# EAGLE board OF1 v1 (EAGLE 9.6.0)
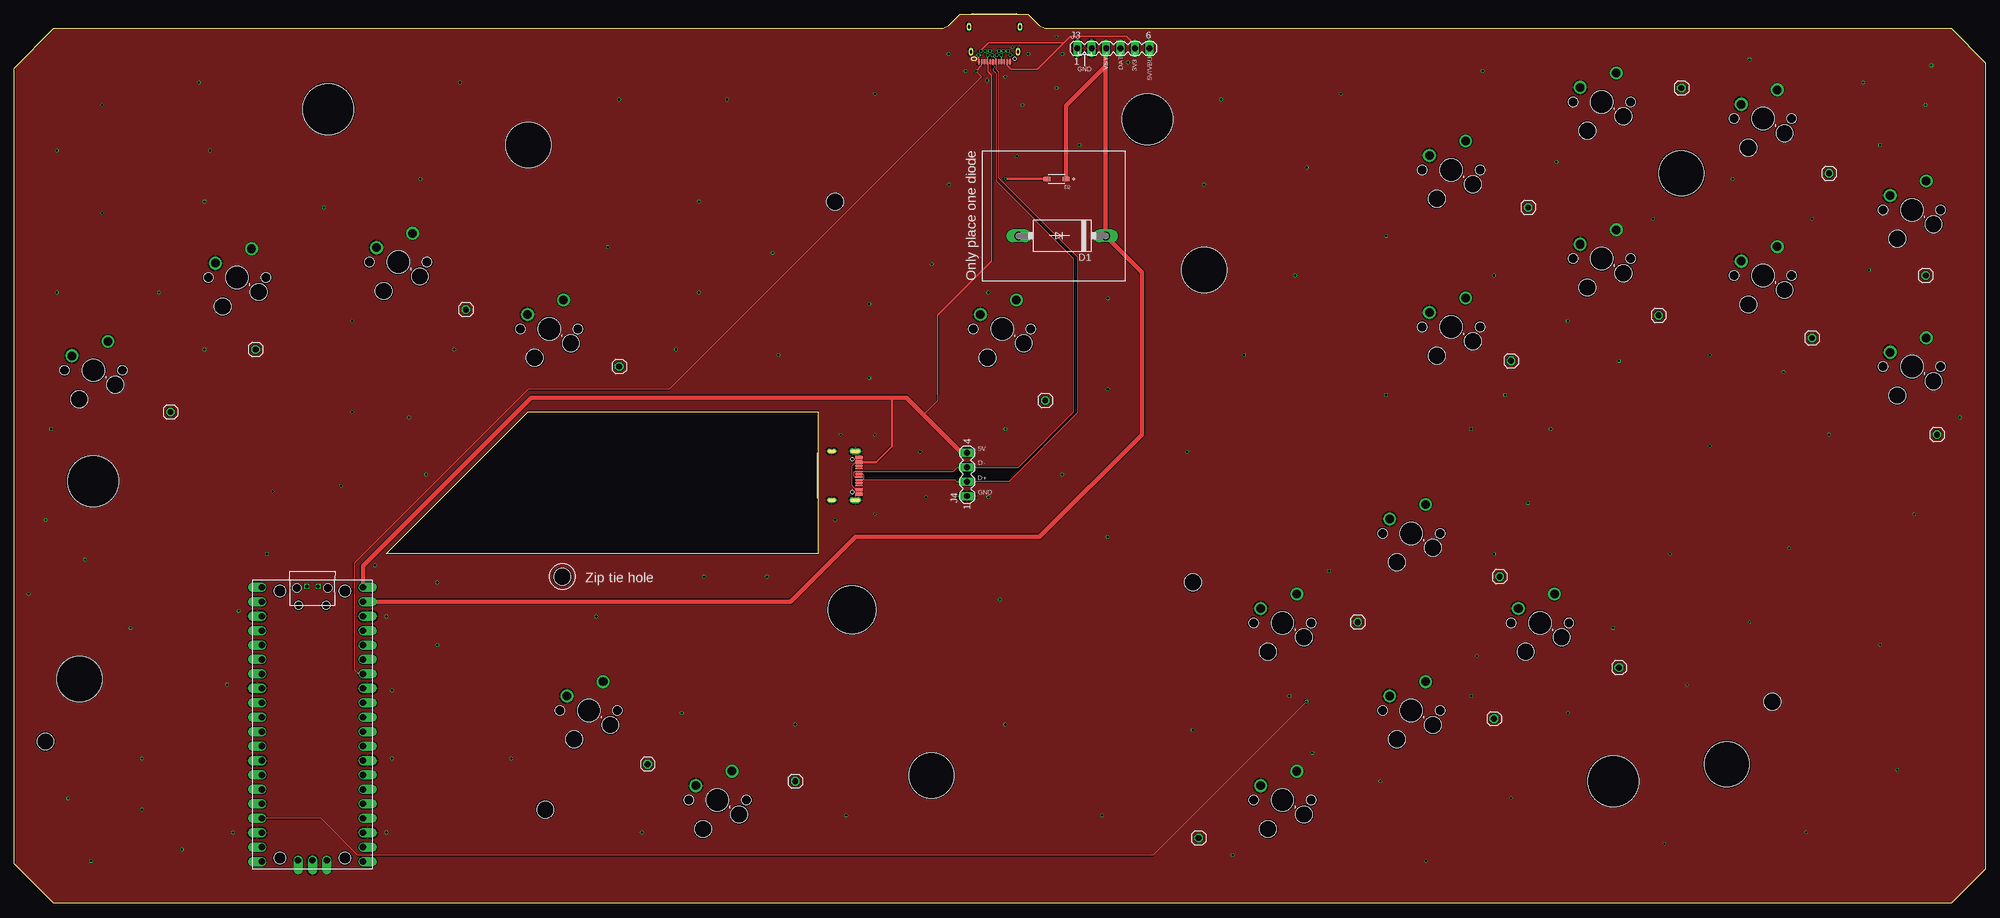
[diagram p0: board, top side]
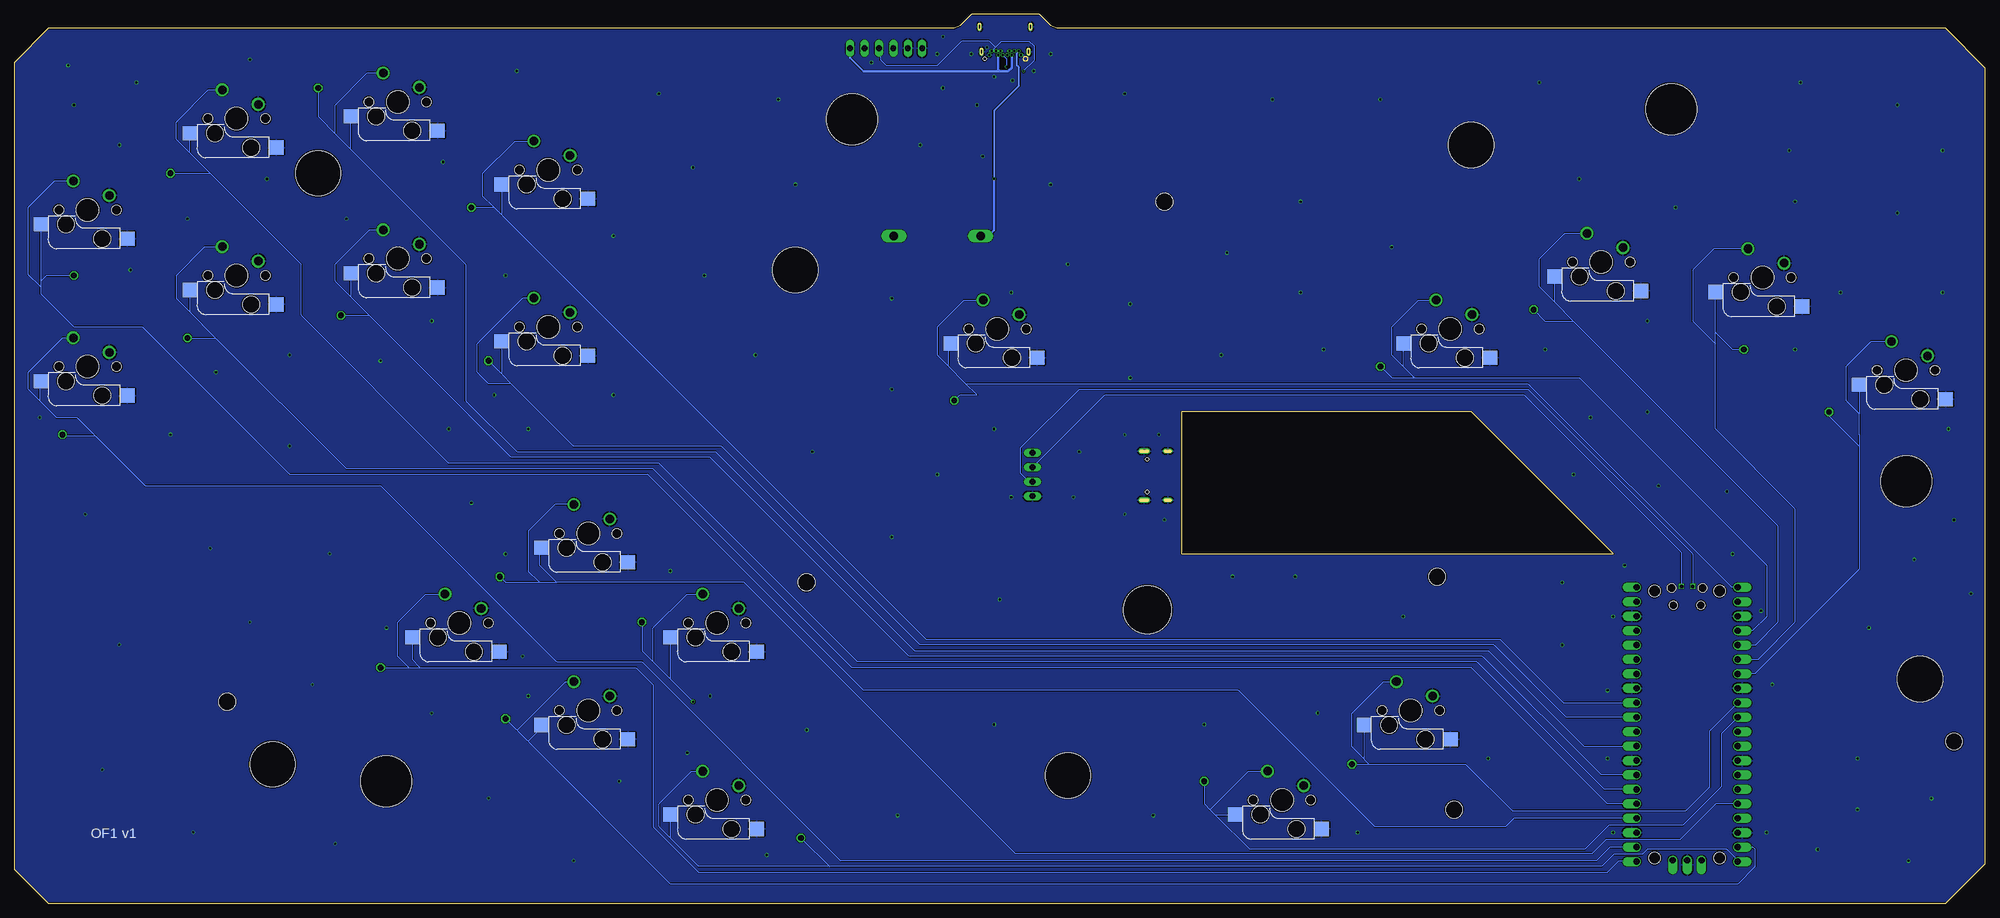
[diagram p1: board, bottom side, seen from below]

Size 347 x 156.5 mm. Coordinates in mm from the lower left corner, seen from the top.
Outline: 0,7 0,147 7,154 163.5,154 164.5,154.5 166.5,156.5 178.5,156.5 180.5,154.5 181.5,154 341,154 347,148 347,6 341,0 7,0 0,7
Outline: 141.5,86.5 141.5,61.5 65.5,61.5 90.5,86.5 141.5,86.5
Copper layers (1*16): Top 0.035559375mm / dielectric 1.6mm / Bottom 0.035559375mm
Design rules "jlcpcb2layer": minimum track width 5mil, minimum drill 12mil, track to track 5mil, track to pad 5mil, pad to pad 5mil, via to via 5mil, smd to smd 5mil, copper to edge 8mil, drill to drill 6mil, minimum pad ring 5mil, minimum via ring 3mil, stop-mask expansion 2.5mil, vias tented up to drill 0mil, thermal gap 10mil
Holes 3 mm at 93.5,16.5 309.5,35.5 5.5,28.5 207.5,56.5 144.5,123.5 96.5,57.5
Holes 8 mm at 293.5,128.5 301.5,24.5 11.5,39.5 90.5,133.5 209.5,111.5 161.5,22.5
Holes 9 mm at 199.5,138 13.9,74.3 55.3,139.8 281.5,21.5
Holes 8.5 mm at 147.5,51.7

## Footprints (pad centres in the part's own frame; a part is rotated, then mirrored left to right if it is on the bottom)
DO201-15 = drill 1.499 long: A 7.62,0; C -7.62,0
SOD3715X145N = smd 1.21 x 0.73: A 1.68,0; C -1.68,0
RPI_PICO_TH = drill 1.1 pad 1.6 offset: 3V3 8.89,13.97; 3V3_EN 8.89,16.51; ADC_VREF 8.89,11.43; AGND 8.89,6.35; GND@1 -8.89,19.05; GND@2 -8.89,6.35; GND@3 -8.89,-6.35; GND@4 -8.89,-19.05; GND@5 0,-23.9; GND@6 8.89,-19.05; GND@7 8.89,-6.35; GND@8 8.89,19.05; GP0 -8.89,24.13; GP1 -8.89,21.59; GP2 -8.89,16.51; GP3 -8.89,13.97; GP4 -8.89,11.43; GP5 -8.89,8.89; GP6 -8.89,3.81; GP7 -8.89,1.27; GP8 -8.89,-1.27; GP9 -8.89,-3.81; GP10 -8.89,-8.89; GP11 -8.89,-11.43; GP12 -8.89,-13.97; GP13 -8.89,-16.51; GP14 -8.89,-21.59; GP15 -8.89,-24.13; GP16 8.89,-24.13; GP17 8.89,-21.59; GP18 8.89,-16.51; GP19 8.89,-13.97; GP20 8.89,-11.43; GP21 8.89,-8.89; GP22 8.89,-3.81; GP26_A0 8.89,1.27; GP27_A1 8.89,3.81; GP28_A2 8.89,8.89; RUN 8.89,-1.27; SWCLK -2.54,-23.9; SWDIO 2.54,-23.9; VBUS 8.89,24.13; VSYS 8.89,21.59 | drill 0.6 pad 0.8 square: TP2 1,24.3; TP3 -1,24.3 | hole 1.5: -2.725,24; 2.725,24; -2.425,20.97; 2.425,20.97 | hole 2.1: -5.7,23.5; 5.7,23.5; -5.7,-23.5; 5.7,-23.5
24P = smd 0.3 x 0.9: A1 -2.75,0; A2 -2.25,0; A3 -1.75,0; A4 -1.25,0; A5 -0.75,0; A6 -0.25,0; A7 0.25,0; A8 0.75,0; A9 1.25,0; A10 1.75,0; A11 2.25,0; A12 2.75,0 | drill 0.4 pad 0.65: B1 2.8,-1.21; B2 2.4,-1.91; B3 1.6,-1.91; B4 1.2,-1.21; B5 0.8,-1.91; B6 0.4,-1.21; B7 -0.4,-1.21; B8 -0.8,-1.91; B9 -1.2,-1.21; B10 -1.6,-1.91; B11 -2.4,-1.91; B12 -2.8,-1.21 | drill 0.5 pad 0.75 long: SHIELD1 -4.13,-1.81; SHIELD2 4.13,-1.81; SHIELD3 -4.49,-6.2; SHIELD4 4.49,-6.2 | hole 0.65: -3.6,-0.56
MA06-1 = drill 1.016 long: 1 -6.35,0; 2 -3.81,0; 3 -1.27,0; 4 1.27,0; 5 3.81,0; 6 6.35,0
MA04-1 = drill 1.016 long: 1 -3.81,0; 2 -1.27,0; 3 1.27,0; 4 3.81,0
16P = smd 0.6 x 1.24: A1/B12 -3.2,4.8; A4/B9 -2.4,4.8; B1/A12 3.2,4.8; B4/A9 2.4,4.8 | smd 0.3 x 1.24: A5 -1.25,4.8; A6 -0.25,4.8; A7 0.25,4.8; A8 1.25,4.8; B5 1.75,4.8; B6 0.75,4.8; B7 -0.75,4.8; B8 -1.75,4.8 | drill 0.6 pad 1.05 long: SHIELD1 -4.32,4.18; SHIELD3 4.32,4.18 | drill 0.6 pad 0.9 long: SHIELD2 -4.32,0; SHIELD4 4.32,0 | hole 0.65: -2.89,3.68; 2.89,3.68
1X01 = drill 1.016 octagon: 1 0,0
MX-BOTH = drill 1.499: P$1 3.81,-2.54; P$2 -2.54,-5.08 | smd 2.55 x 2.5 bottom: P$3 -8.255,2.54; P$4 6.985,5.08 | hole 3.988: 0,0 | hole 3: -3.81,2.54; 2.54,5.08 | hole 1.702: 5.08,0; -5.08,0

## Placement (x,y rotation side)
D1  1N5400  [DO201-15]  184.5,117.5 180 top
D2  1N5819HW-7-F  [SOD3715X145N]  183.5,127.5 180 top
J1  [RPI_PICO_TH]  52.5,31.5 0 top
J2  MOLEX2171830001  [24P]  172.57,148.1 180 top
J3  [MA06-1]  193.5,150.5 0 top
J4  [MA04-1]  167.74,75.5 90 top
J5  GT-USB-7010ASV  [16P]  143.9,75.28 270 top
JP2  [1X01]  27.5,86.5 0 top
JP3  [1X01]  42.5,97.5 0 top
JP4  [1X01]  79.5,104.5 0 top
JP5  [1X01]  106.5,94.5 0 top
JP6  [1X01]  111.5,24.5 0 top
JP7  [1X01]  137.5,21.5 0 top
JP8  [1X01]  181.5,88.5 0 top
JP9  [1X01]  266.5,122.5 0 top
JP10  [1X01]  263.5,95.5 0 top
JP11  [1X01]  289.5,103.5 0 top
JP12  [1X01]  293.5,143.5 0 top
JP13  [1X01]  319.5,128.5 0 top
JP14  [1X01]  336.5,110.5 0 top
JP15  [1X01]  338.5,82.5 0 top
JP16  [1X01]  316.5,99.5 0 top
JP17  [1X01]  261.5,57.5 0 top
JP18  [1X01]  236.5,49.5 0 top
JP19  [1X01]  282.5,41.5 0 top
JP20  [1X01]  260.5,32.5 0 top
JP21  [1X01]  208.5,11.5 0 top
U$1  MX-B  [MX-BOTH]  13.97,93.84 180 top
U$2  MX-B  [MX-BOTH]  39.25,110.14 180 top
U$4  MX-B  [MX-BOTH]  67.6,112.86 180 top
U$5  MX-B  [MX-BOTH]  94.17,101.1 180 top
U$6  MX-B  [MX-BOTH]  101.13,33.95 180 top
U$7  MX-B  [MX-BOTH]  123.82,18.18 180 top
U$8  MX-B  [MX-BOTH]  173.91,101.1 180 top
U$9  MX-B  [MX-BOTH]  252.97,129.08 180 top
U$10  MX-B  [MX-BOTH]  279.49,141.08 180 top
U$11  MX-B  [MX-BOTH]  307.84,138.11 180 top
U$12  MX-B  [MX-BOTH]  334.06,122.07 180 top
U$13  MX-B  [MX-BOTH]  252.97,101.48 180 top
U$14  MX-B  [MX-BOTH]  279.49,113.47 180 top
U$15  MX-B  [MX-BOTH]  307.84,110.5 180 top
U$16  MX-B  [MX-BOTH]  334.06,94.46 180 top
U$17  MX-B  [MX-BOTH]  245.95,65.14 180 top
U$18  MX-B  [MX-BOTH]  223.26,49.37 180 top
U$19  MX-B  [MX-BOTH]  268.61,49.37 180 top
U$20  MX-B  [MX-BOTH]  245.95,33.95 180 top
U$21  MX-B  [MX-BOTH]  223.26,18.18 180 top

## Library data of the parts
D1 = diode
D2 = 1N5819HW-7-F; AVAILABILITY: In Stock; DESCRIPTION: Diode Schottky 40 V 1A Surface Mount SOD-123; MF: Diodes Inc.; MP: 1N5819HW-7-F; PACKAGE: SOD-123 Fairchild Semiconductor; PRICE: None; PURCHASE-URL: https://pricing.snapeda.com/search/part/1N5819HW-7-F/?ref=eda
J1 = RaspberryPi_Pico
J2 = Molex 2171830001 type c
J3 J4 = con-lstb; OC_FARNELL: unknown; OC_NEWARK: unknown
J5 = GT-USB-7010ASV
JP2-JP21 = pinhead
U$1 U$2 U$4-U$21 = MX-H

## Nets
+5V: J1.VBUS J2.A4 J2.A9 J2.B4 J2.B9 J3.6 J4.4 J5.A4/B9 J5.B4/A9
A: J1.GP14 JP20.1 U$20.P$2 U$20.P$3
B: J1.GP26_A0 JP10.1 U$13.P$2 U$13.P$3
C_DN: J1.GP15 JP21.1 U$21.P$2 U$21.P$3
C_LT: J1.GP13 JP18.1 U$18.P$2 U$18.P$3
C_RT: J1.GP16 JP19.1 U$19.P$2 U$19.P$3
C_UP: J1.GP12 JP17.1 U$17.P$2 U$17.P$3
D+: J1.TP3 J2.A6 J2.B6 J4.2 J5.A6 J5.B6
D-: J1.TP2 J2.A7 J2.B7 J4.3 J5.A7 J5.B7
DATA: J1.GP28_A2 J2.A11 J2.B11 J3.4
DOWN: J1.GP3 JP4.1 U$4.P$2 U$4.P$3
GND: J1.AGND J1.GND@1 J1.GND@2 J1.GND@3 J1.GND@4 J1.GND@5 J1.GND@6 J1.GND@7 J1.GND@8 J2.A1 J2.A12 J2.B1 J2.B12 J2.SHIELD1 J2.SHIELD2 J2.SHIELD3 J2.SHIELD4 J3.1 J3.2 J4.1 J5.A1/B12 J5.B1/A12 J5.SHIELD1 J5.SHIELD2 J5.SHIELD3 J5.SHIELD4 U$1.P$1 U$1.P$4 U$2.P$1 U$2.P$4 U$4.P$1 U$4.P$4 U$5.P$1 U$5.P$4 U$6.P$1 U$6.P$4 U$7.P$1 U$7.P$4 U$8.P$1 U$8.P$4 U$9.P$1 U$9.P$4 U$10.P$1 U$10.P$4 U$11.P$1 U$11.P$4 U$12.P$1 U$12.P$4 U$13.P$1 U$13.P$4 U$14.P$1 U$14.P$4 U$15.P$1 U$15.P$4 U$16.P$1 U$16.P$4 U$17.P$1 U$17.P$4 U$18.P$1 U$18.P$4 U$19.P$1 U$19.P$4 U$20.P$1 U$20.P$4 U$21.P$1 U$21.P$4
L: J1.GP5 JP2.1 U$1.P$2 U$1.P$3
LEFT: J1.GP4 JP3.1 U$2.P$2 U$2.P$3
LS: J1.GP20 JP13.1 U$11.P$2 U$11.P$3
M1: J1.GP6 JP6.1 U$6.P$2 U$6.P$3
M2: J1.GP7 JP7.1 U$7.P$2 U$7.P$3
MS: J1.GP18 JP14.1 U$12.P$2 U$12.P$3
R: J1.GP27_A1 JP9.1 U$9.P$2 U$9.P$3
RIGHT: J1.GP2 JP5.1 U$5.P$2 U$5.P$3
START: J1.GP0 JP8.1 U$8.P$2 U$8.P$3
UP: J1.GP17 JP15.1 U$16.P$2 U$16.P$3
V+: D1.A D2.A J2.A2 J2.B2 J3.5
VCC: D1.C D2.C J1.VSYS J3.3
X: J1.GP21 JP11.1 U$14.P$2 U$14.P$3
Y: J1.GP22 JP12.1 U$10.P$2 U$10.P$3
Z: J1.GP19 JP16.1 U$15.P$2 U$15.P$3

## Tracks (layer width: path | path; a pad name or v marks a point on that pad's centre or on a via)
+5V
  Top 0.2: J5.B4/A9 148.16,72.88 147.5,73.54 147.5,77.07 148.12,77.68 J5.A4/B9 | 162.5,89.49 162.5,88.45 160.05,86
  Top 0.254: J2.B9 173.81,149.27 J2.A4 | J2.B4 171.31,149.26 J2.A9 171.41,148 171.41,146.37 172.05,145.73 172.05,113.05 162.5,103.5 162.5,89.49
  Top 0.4: J5.A4/B9 151.68,77.68 154.5,80.5 154.5,89
  Top 0.8: J1.VBUS 61.39,59.39 91,89 154.5,89 157.05,89 160.05,86 161.05,85 166.74,79.31 J4.4
  Bottom 0.4: J2.B4 171.37,147.12 172.03,146.45 173.5,146.45 | 173.5,146.45 197.45,146.45 199.85,148.85 J3.6 | 173.5,146.45 173.77,146.72 J2.B9
A
  Bottom 0.2: 256.5,28.5 231.5,3.5 43.5,3.5 40.5,6.5 40.5,9.5 40.91,9.91 J1.GP14 | JP20.1 258.5,30.5 | 258.5,30.5 256.5,28.5 | 256.5,28.5 254.21,30.79 U$20.P$3 | U$20.P$2 249.97,39.03 258.5,30.5
B
  Bottom 0.2: J1.GP26_A0 73.77,32.77 86.5,45.5 187.5,45.5 222.5,80.5 248.5,80.5 259.5,91.5 | 261.22,93.22 259.5,91.5 | 261.22,93.22 JP10.1 | U$13.P$3 261.22,93.22 | 259.5,91.5 263.5,91.5 265.5,93.5 265.5,98.5 257.44,106.56 U$13.P$2
C_DN
  Bottom 0.2: 231.52,11.52 226.5,6.5 203.5,6.5 | J1.GP15 43.61,7.61 45.5,9.5 59.5,9.5 60.37,8.63 65.37,8.63 67.5,6.5 203.5,6.5 | JP21.1 203.5,6.5 | 231.52,11.52 233.5,13.5 233.5,17.5 227.74,23.26 U$21.P$2 | U$21.P$3 231.52,11.52
C_LT  (via drill 0.4)
  Top 0.2: v227.5,35.5 200.5,8.5 60.5,8.5 54.01,14.99 J1.GP13
  Bottom 0.2: 231.52,39.52 v227.5,35.5 | JP18.1 236.5,44.5 234.5,42.5 | 234.5,42.5 231.52,39.52 | U$18.P$3 231.52,39.52 | 234.5,42.5 234.5,48.5 228.55,54.45 U$18.P$2
C_RT
  Bottom 0.2: J1.GP16 61.52,7.5 64.5,7.5 66.5,5.5 226.5,5.5 234.5,13.5 234.5,38.5 237.5,41.5 275.5,41.5 | 275.5,41.5 276.86,42.86 | 276.86,42.86 | JP19.1 277.5,41.5 | 277.5,41.5 275.5,41.5 | 277.5,41.5 279.5,43.5 279.5,49.5 274.55,54.45 U$19.P$2 | 276.86,42.86 U$19.P$3
C_UP
  Bottom 0.2: J1.GP12 47.47,17.53 53.72,11.28 66.72,11.28 69.17,8.83 170.83,8.83 218.5,56.5 251.5,56.5 | JP17.1 260.5,56.5 254.5,56.5 | 254.5,56.5 251.5,56.5 | 254.5,56.5 256.5,58.5 256.5,65.5 251.78,70.22 U$17.P$2 | 251.5,56.5 254.5,59.5 254.5,62.3 U$17.P$3
D+
  Top 0.152: J2.A6 172.82,146.87 173.28,146.41 173.28,127.72 187.19,113.81 187.19,86.33 175.09,74.23 J4.2
  Top 0.2: J2.B6 172.82,148.66 J2.A6 | J4.2 165.89,74.23 165.59,74.53 J5.B6 149.36,74.53 149.54,74.72 149.54,75.38 149.39,75.53 J5.A6
  Bottom 0.2: J4.2 168.34,74.23 169.81,75.7 169.81,80.19 159.5,90.5 80.5,90.5 51.5,61.5 J1.TP3
D-  (via drill 0.3)
  Top 0.152: J4.3 176.77,76.77 186.5,86.5 186.5,113.5 172.84,127.16 172.84,146.13 172.32,146.64 v172.32,147.25 | J2.A7
  Top 0.2: v172.32,147.25 J2.A7 | J5.B7 165.32,76.03 166.06,76.77 J4.3 | J5.A7 148,75.03 147.85,75.18 147.85,75.88 148.01,76.03 J5.B7 | J5.B7
  Bottom 0.152: 172.31,147.26 v172.32,147.25
  Bottom 0.2: J2.B7 172.31,148.66 172.31,147.26 | J4.3 155.01,89.5 81.2,89.5 53.5,61.8 J1.TP2
DATA  (via drill 0.3)
  Top 0.2: J1.GP28_A2 60.61,40.39 59.85,41.15 59.85,59.85 90.49,90.49 115.32,90.49 170.32,145.49 v169.32,146.49
  Top 0.254: J2.A11 170.32,147.49 v169.32,146.49
  Bottom 0.152: v169.33,146.5 v169.32,146.49
  Bottom 0.2: v169.32,146.49 169.32,146.51 167.43,148.4 167.43,150.88 168.24,151.69 173.27,151.69 174.27,150.69 | J2.B11 174.95,150.01 174.27,150.69 | J3.4 194.5,150.23 194.5,148.5 193.5,147.5 184.5,147.5 180.19,151.81 175.38,151.81 174.27,150.69
DOWN
  Bottom 0.2: J1.GP3 40.53,45.47 36.5,49.5 36.5,66.5 72.5,102.5 | JP4.1 77.5,102.5 72.5,102.5 | U$4.P$3 75.86,105.86 | 75.86,105.86 72.5,102.5 | U$4.P$2 74.06,117.94 78.5,113.5 78.5,108.5 75.86,105.86
GND  (via drill 0.35, 0.4)
  Top 0.254: J2.B1 169.77,148.15 J2.A12
  other vias: 175.7,150.66 38.5,12.5 37.5,38.5 65.5,12.5 39.5,51.5 66.5,25.5 65.5,50.5 224.5,36.5 171.5,71.5 191.5,15.5 146.5,15.5 87.5,25.5 110.5,12.5 121.5,57.5 173.5,53.5 241.5,89.5 216.5,96.5 241.5,117.5 209.5,126.5 233.5,142.5 271.5,130.5 273.5,102.5 298.5,96.5 319.5,82.5 326.5,111.5 302.5,127.5 22.5,25.5 6.5,83.5 33.5,97.5 59.5,102.5 77.5,97.5 15.5,121.5 71.5,127.5 104.5,115.5 125.5,141.5 151.5,142.5 183.5,143.5 177.5,140.5 167.5,146.5 174.5,145.5 171.27,144.84 178.5,149.5 164.5,149.5 117.5,33.5 174.5,31.5 207.5,30.5 214.5,8.5 228.5,26.5 256.5,36.5 240.5,21.5 164.5,126.5 171.5,107.5 159.5,79.5 174.5,83.5 184.5,149.5 196.13,148 132.5,57.5 102.5,50.5 72.5,75.5 74.5,56.5 22.5,16.5 29.5,9.5 13.5,7.5 9.5,18.5 20.5,48.5 2.5,54.5 12.5,60.5 5.5,67.5 44.5,61.5 45.5,72.5 59.5,86.5 57.5,73.5 69.5,85.5 63.5,59.5 25.5,107.5 7.5,107.5 33.5,123.5 7.5,132.5 15.5,140.5 34.5,132.5 32.5,144.5 54.5,122.5 78.5,144.5 106.5,141.5 116.5,97.5 120.5,107.5 120.5,123.5 133.5,114.5 134.5,96.5 150.5,105.5 150.5,92.5 161.5,112.5 176.5,131.5 187.5,133.5 192.5,106.5 192.5,90.5 184.5,75.5 192.5,64.5 206.5,79.5 225.5,110.5 227.5,129.5 212.5,141.5 258.5,146.5 260.5,110.5 262.5,89.5 256.5,83.5 270.5,83.5 282.5,95.5 288.5,120.5 305.5,148.5 325.5,144.5 337.5,147.5 328.5,133.5 336.5,140.5 316.5,120.5 311.5,93.5 298.5,80.5 342.5,85.5 260.5,61.5 266.5,70.5 231.5,58.5 281.5,48.5 257.5,43.5 137.5,31.5 74.5,45.5 66.5,37.5 183.5,152.5 291.5,61.5 312.5,62.5 334.5,68.5 328.5,45.5 331.5,23.5 315.5,12.5 305.5,49.5 273.5,33.5 263.5,18.5 290.5,10.5 248.5,7.5 294.5,38.5 145.5,82.5 151.5,82.5 144.5,67.5 151.5,68.5 160.5,71.5
  pour Bottom: -2.5,166.5 347.5,166.5 353.5,160.5 353.5,-11.5 348.5,-16.5 3.5,-16.5 -7.5,-5.5 -7.5,161.5
  pour Top: 28.5,169.5 352.5,169.5 354.5,167.5 357.5,164.5 357.5,-22.5 86.5,-22.5 85.5,-23.5 -4.5,-23.5 -16.5,-11.5 -16.5,162.5 -18.5,164.5 -12.5,170.5 11.5,170.5 27.5,170.5
L
  Bottom 0.2: J1.GP5 40.61,40.39 22.22,58.78 22.22,80.5 | U$1.P$3 22.22,86.22 | 22.22,80.5 22.22,82.5 22.22,86.22 | JP2.1 27.5,85.78 22.22,80.5 | 22.22,86.22 24.5,88.5 24.5,94.5 20.08,98.92 U$1.P$2
LEFT
  Bottom 0.2: J1.GP4 40.08,42.92 33.5,49.5 33.5,69.5 47.5,83.5 47.5,98.5 | 47.5,98.5 47.5,100.5 | 47.5,100.5 U$2.P$3 | U$2.P$2 47.78,115.22 51.5,111.5 51.5,102.5 47.5,98.5 | 47.5,100.5 44.5,97.5 JP3.1
LS
  Bottom 0.2: J1.GP20 67.07,20.07 89.5,42.5 198.5,42.5 233.5,77.5 270.5,77.5 296.5,103.5 296.5,112.5 312.5,128.5 | 312.5,128.5 316.1,132.09 | JP13.1 312.5,128.5 | 316.1,132.09 U$11.P$3 | 316.1,132.09 318.5,134.5 318.5,137.5 312.81,143.19 U$11.P$2
M1
  Bottom 0.2: J1.GP6 48.5,30.42 48.5,20.5 52.73,16.27 83.27,16.27 91.5,24.5 108.5,24.5 | JP6.1 108.5,24.5 | U$6.P$3 109.39,25.5 | 109.39,25.5 109.39,25.39 108.5,24.5 | 109.39,25.5 111.5,27.61 111.5,33.5 105.97,39.03 U$6.P$2
M2
  Bottom 0.2: J1.GP7 46.5,29.88 46.5,20.5 53.23,13.77 66.23,13.77 70.5,9.5 129.5,9.5 135.5,15.5 | JP7.1 137.5,17.5 136.5,16.5 | 136.5,16.5 135.5,15.5 | 135.5,15.5 132.22,15.5 U$7.P$3 | 136.5,16.5 129.74,23.26 U$7.P$2
MS
  Bottom 0.2: 342.32,109.5 342.32,108.5 | 342.32,108.5 342.32,107.32 336.5,101.5 324.5,101.5 298.5,75.5 235.5,75.5 197.5,37.5 131.5,37.5 107.5,13.5 84.5,13.5 83.01,14.99 J1.GP18 | JP14.1 341.32,110.5 342.32,109.5 | U$12.P$3 342.32,109.5 | 342.32,108.5 344.5,110.68 344.5,122.5 339.85,127.15 U$12.P$2
R
  Bottom 0.2: J1.GP27_A1 74.31,35.31 85.5,46.5 186.5,46.5 261.22,121.22 | JP9.1 262.5,122.5 | 262.5,122.5 261.22,121.22 | U$9.P$3 261.22,121.22 | 262.5,122.5 264.5,124.5 264.5,128.5 258.83,134.17 U$9.P$2
RIGHT
  Bottom 0.2: J1.GP2 40.97,48.01 38.5,50.48 38.5,59.5 71.5,92.5 100.5,92.5 | JP5.1 104.5,92.5 100.5,92.5 | 100.5,92.5 102.5,94.5 | 102.5,94.5 102.5,98.49 U$5.P$3 | 102.5,94.5 104.5,96.5 104.5,101.5 99.82,106.18 U$5.P$2
START
  Bottom 0.2: JP8.1 180.5,89.5 177.5,89.5 179.5,91.5 | 179.5,91.5 80.5,91.5 44.63,55.63 J1.GP0 | 179.5,91.5 182.5,94.5 | 182.5,94.5 182.5,98.22 U$8.P$3 | 182.5,94.5 184.5,96.5 184.5,101.5 179.82,106.18 U$8.P$2
UP
  Bottom 0.2: J1.GP17 66.09,9.91 68.5,7.5 201.5,7.5 236.5,42.5 251.5,42.5 282.5,73.5 323.9,73.5 332.7,82.3 | JP15.1 338.3,82.3 332.7,82.3 | 332.7,82.3 335.9,85.5 339.5,85.5 342.5,88.5 | 342.5,88.5 342.5,91.74 U$16.P$3 | 342.5,88.5 344.5,90.5 344.5,93.5 338.46,99.54 U$16.P$2
V+  (via drill 0.35)
  Top 0.254: J2.B2 170.17,150.17 171.5,151.5 184.85,151.5 | 184.85,151.5 186,152.65 195.8,152.65 197.31,151.14 J3.5 | J2.A2 174.82,147.51 175.5,146.83 180.18,146.83 184.85,151.5
  Top 0.406: v174.5,127.5 D2.A
  Bottom 0.34: J2.B2 170.17,149.93 170.5,149.59 170.5,147.5 170.13,147.13 170.13,143.92 174.5,139.55 v174.5,127.5
  Bottom 0.406: v174.5,127.5 174.5,118.5 175.5,117.5 D1.A
VCC
  Top 0.8: J1.VSYS 136.71,53.09 148.12,64.5 180.5,64.5 198.5,82.5 198.5,111.12 D1.C 192.13,117.51 192.13,147.36 | 192.12,150.39 J3.3 192.13,150.4 192.13,147.36 | D2.C 185.18,140.4 192.13,147.36
X
  Bottom 0.2: J1.GP21 67.61,22.61 88.5,43.5 189.5,43.5 224.5,78.5 259.5,78.5 284.5,103.5 | 284.5,103.5 287.74,106.74 | JP11.1 284.5,103.5 | U$14.P$3 287.74,106.74 | 287.74,106.74 290.5,109.5 290.5,112.5 284.45,118.55 U$14.P$2
Y
  Bottom 0.2: J1.GP22 70.69,27.69 87.5,44.5 188.5,44.5 223.5,79.5 258.5,79.5 267.5,88.5 267.5,112.5 287.74,132.74 | JP12.1 293.5,138.5 290.5,135.5 | 287.74,132.74 U$10.P$3 | 290.5,135.5 287.74,132.74 | 290.5,135.5 290.5,140.5 284.84,146.16 U$10.P$2
Z
  Bottom 0.2: J1.GP19 66.53,17.53 90.5,41.5 199.5,41.5 234.5,76.5 288.5,76.5 311.5,99.5 | JP16.1 311.5,99.5 | U$15.P$2 313.42,115.58 318.5,110.5 318.5,106.5 316.1,104.09 | 311.5,99.5 316.1,104.09 | U$15.P$3 316.1,104.09

## Text on the board
tNames: GND | VSYS | DATA | 3V3 in | 5V/VBUS | Only place one diode | 5V | D- | D+ | GND | Zip tie hole
bNames: OF1 v1